# EAGLE board Main PCB (EAGLE 9.1.3)
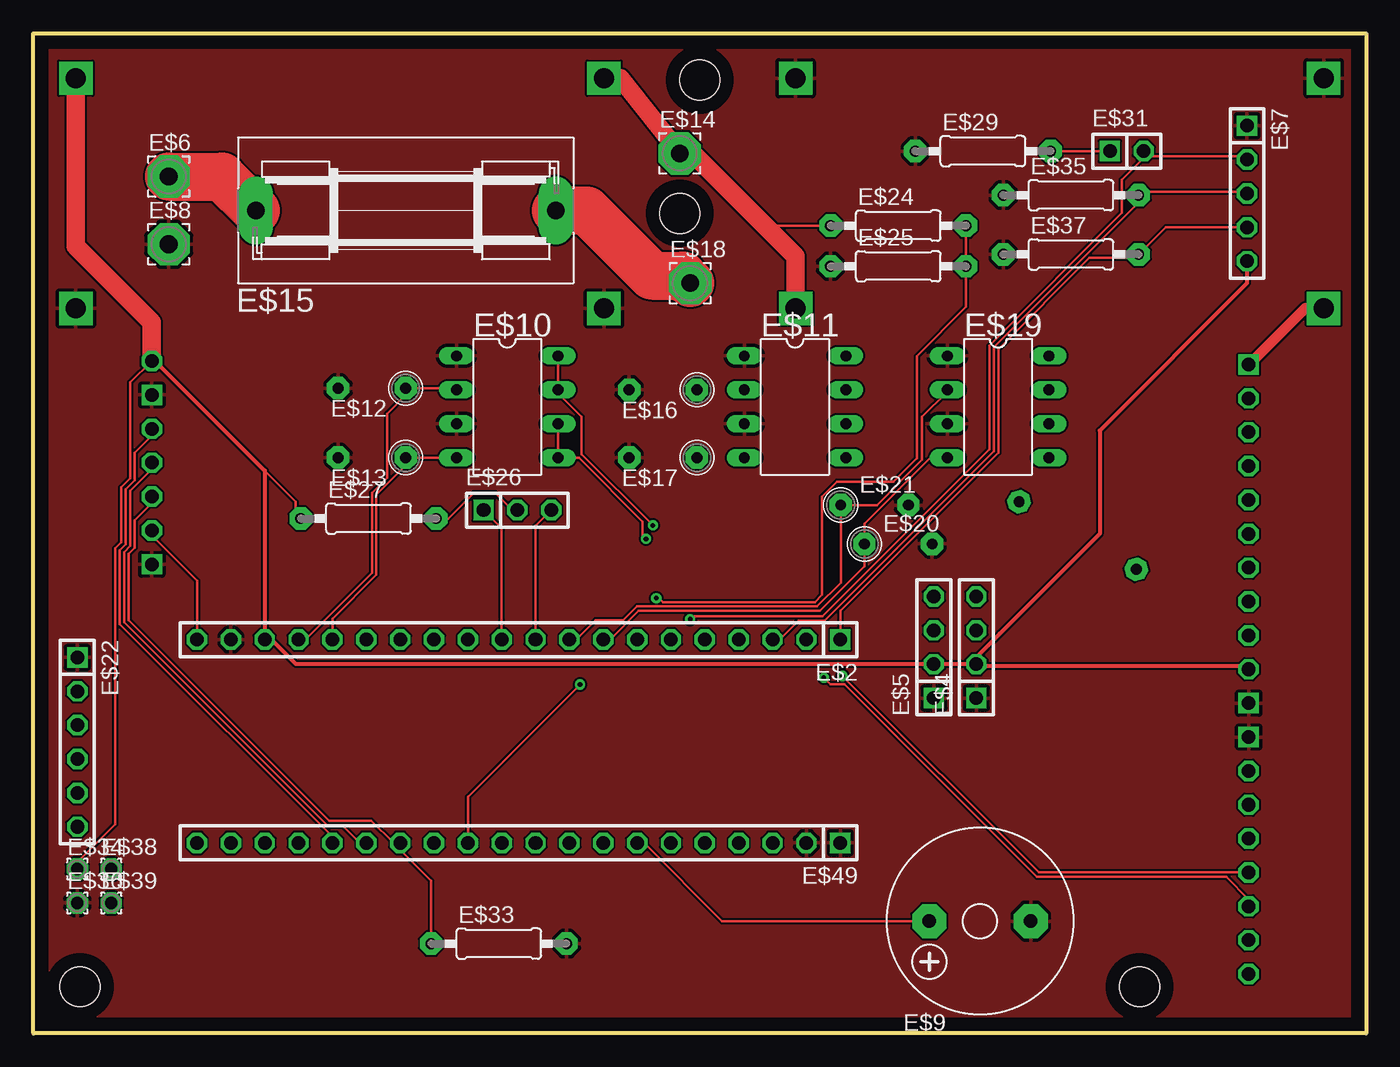
[diagram p0: board, top side]
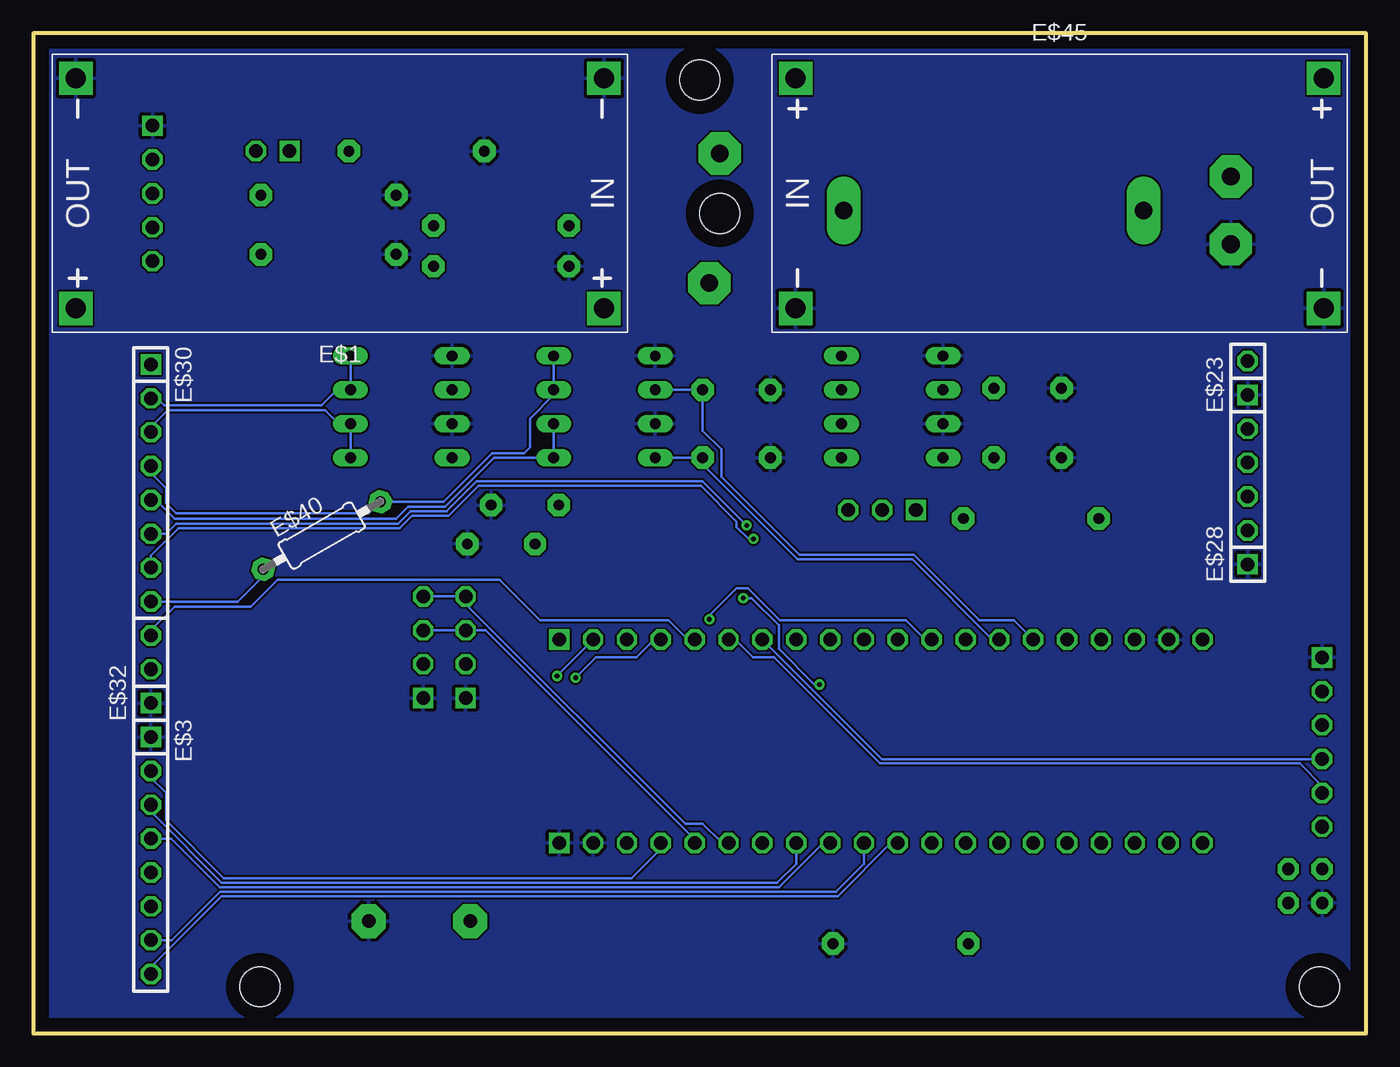
[diagram p1: board, bottom side, seen from below]

Size 100 x 75 mm. Coordinates in mm from the lower left corner, seen from the top.
Outline: 0,0 0,75 100,75 100,0 0,0
Copper layers (1*16): Top 0.035mm / dielectric 1.5mm / Bottom 0.035mm
Design rules "default": minimum track width 6mil, minimum drill 0.35mm, track to track 6mil, track to pad 6mil, pad to pad 6mil, via to via 6mil, smd to smd 6mil, copper to edge 40mil, drill to drill 6mil, minimum pad ring 10mil, minimum via ring 8mil, stop-mask expansion 4mil, vias tented up to drill 0mil, thermal gap 10mil
Holes 3 mm at 3.5,3.5 83,3.5 50,71.5 48.5,61.5

## Footprints (pad centres in the part's own frame; a part is rotated, then mirrored left to right if it is on the bottom)
DC-DC-STEP-DOWN-LM2596 = drill 1.5 pad 2.5 square: IN+ -19.812,8.636; IN- -19.812,-8.636; OUT+ 19.812,8.636; OUT- 19.812,-8.636
1X20 = drill 1.016 square: 1 -24.13,0 | drill 1.016 octagon: 2 -21.59,0; 3 -19.05,0; 4 -16.51,0; 5 -13.97,0; 6 -11.43,0; 7 -8.89,0; 8 -6.35,0; 9 -3.81,0; 10 -1.27,0; 11 1.27,0; 12 3.81,0; 13 6.35,0; 14 8.89,0; 15 11.43,0; 16 13.97,0; 17 16.51,0; 18 19.05,0; 19 21.59,0; 20 24.13,0
1X08 = drill 1.016 square: 1 -8.89,0 | drill 1.016 octagon: 2 -6.35,0; 3 -3.81,0; 4 -1.27,0; 5 1.27,0; 6 3.81,0; 7 6.35,0; 8 8.89,0
1X04 = drill 1.016 square: 1 -3.81,0 | drill 1.016 octagon: 2 -1.27,0; 3 1.27,0; 4 3.81,0
3,17/1,3 = drill 1.321 pad 3.175 octagon: 1 0,0
1X05 = drill 1.016 square: 1 -5.08,0 | drill 1.016 octagon: 2 -2.54,0; 3 0,0; 4 2.54,0; 5 5.08,0
F/CM12P = drill 1.016 pad 2.54 octagon: + 3.81,0; - -3.81,0
DIL8 = drill 0.813 long: 1 -3.81,-3.81; 2 -1.27,-3.81; 3 1.27,-3.81; 4 3.81,-3.81; 5 3.81,3.81; 6 1.27,3.81; 7 -1.27,3.81; 8 -3.81,3.81
0207/5V = drill 0.813 pad 1.676 octagon: 1 -2.54,0; 2 2.54,0
SH22,5A = drill 1.321 pad 2.54 long: 1 -11.252,0; 2 11.252,0
1X06 = drill 1.016 square: 1 -6.35,0 | drill 1.016 octagon: 2 -3.81,0; 3 -1.27,0; 4 1.27,0; 5 3.81,0; 6 6.35,0
1X02 = drill 1.016 square: 1 -1.27,0 | drill 1.016 octagon: 2 1.27,0
0207/10 = drill 0.813 pad 1.676 octagon: 1 -5.08,0; 2 5.08,0
1X03 = drill 1.016 square: 1 -2.54,0 | drill 1.016 octagon: 2 0,0; 3 2.54,0
1,6/0,9 = drill 0.914 pad 1.6 octagon: 1 0,0

## Placement (x,y rotation side)
E$1  [DC-DC-STEP-DOWN-LM2596]  77,63 180 bottom
E$2  [1X20]  36.41,29.53 180 top
E$3  [1X08]  91.19,13.34 270 bottom
E$4  [1X04]  70.75,28.96 90 top
E$5  [1X04]  67.56,28.96 90 top
E$6  [3,17/1,3]  10.16,64.26 0 top
E$7  [1X05]  91.06,62.99 270 top
E$8  [3,17/1,3]  10.16,59.18 0 top
E$9  [F/CM12P]  71.03,8.42 180 top
E$10  [DIL8]  35.56,46.99 270 top
E$11  [DIL8]  57.15,46.99 270 top
E$12  [0207/5V]  25.4,48.39 180 top
E$13  [0207/5V]  25.4,43.18 180 top
E$14  [3,17/1,3]  48.5,66 0 top
E$15  [SH22,5A]  27.94,61.72 0 top
E$16  [0207/5V]  47.24,48.26 180 top
E$17  [0207/5V]  47.24,43.18 180 top
E$18  [3,17/1,3]  49.28,56.26 0 top
E$19  [DIL8]  72.39,46.99 270 top
E$20  [0207/5V]  64.9,36.7 0 top
E$21  [0207/5V]  63.12,39.62 0 top
E$22  [1X06]  3.3,21.84 270 top
E$23  [1X02]  8.89,49.15 90 bottom
E$24  [0207/10]  64.9,60.58 0 top
E$25  [0207/10]  64.9,57.53 0 top
E$26  [1X03]  36.32,39.24 0 top
E$27  [0207/10]  25.15,38.61 0 top
E$28  [1X05]  8.89,40.26 90 bottom
E$29  [0207/10]  71.25,66.17 0 top
E$30  [1X08]  91.19,41.27 270 bottom
E$31  [1X02]  82.04,66.17 0 top
E$32  [1X03]  91.19,27.3 90 bottom
E$33  [0207/10]  34.92,6.73 0 top
E$34  [1,6/0,9]  3.3,12.32 0 top
E$35  [0207/10]  77.85,62.87 0 top
E$36  [1,6/0,9]  3.3,9.78 0 top
E$37  [0207/10]  77.85,58.42 0 top
E$38  [1,6/0,9]  5.84,12.32 0 top
E$39  [1,6/0,9]  5.84,9.78 0 top
E$40  [0207/10]  78.36,37.34 30 bottom
E$45  [DC-DC-STEP-DOWN-LM2596]  23,63 0 bottom
E$49  [1X20]  36.41,14.29 180 top

## Library data of the parts
E$1 E$45 = diy-modules
E$2-E$5 E$7 E$22 E$23 E$26 E$28 E$30-E$32 E$49 = female headers
E$6 E$8 E$14 E$18 E$34 E$36 E$38 E$39 = wirepad
E$9 = buzzer
E$10 E$11 E$19 = microchip
E$12 E$13 E$16 E$17 E$20 E$21 E$24 E$25 E$27 E$29 E$33 E$35 E$37 E$40 = adafruit
E$15 = fuse

## Nets
GND: E$1.IN- E$1.OUT- E$2.19 E$3.1 E$4.1 E$5.1 E$7.1 E$8.1 E$9.- E$10.1 E$10.3 E$11.1 E$11.3 E$12.2 E$13.2 E$16.2 E$17.2 E$19.1 E$19.3 E$20.2 E$21.2 E$22.1 E$23.1 E$25.1 E$28.1 E$29.1 E$32.1 E$33.2 E$35.1 E$36.1 E$37.1 E$45.IN- E$45.OUT- E$49.1 E$49.2
S$1: E$6.1 E$15.1
S$2: E$15.2 E$18.1
S$3: E$24.2 E$25.2 E$49.12
S$4: E$2.5 E$32.3
S$5: E$2.18 E$4.2 E$5.2 E$7.5 E$23.2 E$27.1 E$32.2 E$34.1 E$45.OUT+
S$6: E$1.OUT+ E$30.1
S$7: E$2.20 E$28.2
S$8: E$9.+ E$49.7
S$9: E$4.3 E$5.3 E$49.5
S$10: E$4.4 E$5.4 E$49.6
S$11: E$30.8 E$40.1
S$12: E$26.2 E$27.2
S$13: E$2.7 E$22.4
S$14: E$2.6 E$22.5
S$15: E$3.8 E$49.11
S$16: E$3.7 E$49.10
S$17: E$2.2 E$3.5
S$18: E$2.4 E$3.6
S$19: E$3.4 E$49.9
S$20: E$3.3 E$49.8
S$21: E$3.2 E$49.4
S$22: E$2.11 E$26.1
S$23: E$2.10 E$26.3
S$24: E$2.1 E$7.4 E$37.2
S$25: E$2.17 E$10.2 E$12.1
S$26: E$28.5 E$49.16
S$27: E$28.4 E$49.15
S$28: E$28.3 E$33.1 E$49.14
S$30: E$2.3 E$7.3 E$35.2
S$31: E$11.7 E$11.8 E$30.4 E$40.2
S$32: E$1.IN+ E$14.1 E$24.1 E$45.IN+
S$34: E$29.2 E$31.1
S$35: E$2.16 E$10.4 E$13.1
S$36: E$2.15 E$11.2 E$16.1
S$37: E$2.14 E$11.4 E$17.1
S$38: E$11.5 E$11.6 E$30.5
S$39: E$2.8 E$19.4 E$20.1
S$40: E$2.9 E$19.2 E$21.1
S$41: E$19.7 E$19.8 E$30.2
S$42: E$19.5 E$19.6 E$30.3
S$43: E$10.7 E$10.8 E$30.6
S$44: E$10.5 E$10.6 E$30.7
S$45: E$2.12 E$7.2 E$31.2

## Tracks (layer width: path | path; a pad name or v marks a point on that pad's centre or on a via)
GND
  pour Top: -5.08,80.01 -5.08,-1.27 5.08,-11.43 105.41,-11.43 110.49,-6.35 121.92,5.08 121.92,74.93 116.84,80.01
  pour Bottom: -16.51,86.36 -15.24,85.09 -15.24,-5.08 -6.35,-13.97 64.77,-13.97 93.98,-13.97 127,19.05 127,74.93 116.84,85.09 115.57,86.36
S$1
  Top 3.6: E$6.1 14.15,64.26 E$15.1
S$2
  Top 3.6: E$15.2 41.52,61.72 46.41,56.83 48.71,56.83 E$18.1
S$3  (via drill 0.35)
  Top 0.184: E$24.2 E$25.2 69.98,54.48 66.29,50.8 66.29,43.12 64.55,41.37 60.29,41.37 59.18,40.26 59.18,32.89 58.64,32.35 47.24,32.35 46.95,32.64 v46.74,32.64 | v41.02,26.16 32.6,17.74 E$49.12
  Bottom 0.184: v46.74,32.64 46.1,32.64 44.07,30.61 44.07,28.83 41.4,26.16 v41.02,26.16
S$4
  Bottom 0.184: E$2.5 50.89,29.53 52.35,30.99 61.98,30.99 65.02,34.04 81.66,34.04 83.69,32 89.41,32 91.19,30.23 E$32.3
S$5
  Top 0.184: 17.36,42.2 19.68,39.88 19.68,38.99 E$27.1 | E$23.2 7.28,48.81 7.28,41.64 6.61,40.96 6.61,36.84 6.15,36.37 6.15,15.67 3.3,12.83 E$34.1
  Top 0.3: E$4.2 E$5.2 19.71,27.69 17.87,29.53 E$2.18 17.36,41.57 17.36,42.2 9.14,50.42 E$23.2 | E$4.2 70.75,28.2 72.52,29.97 80.01,37.47 80.01,45.21 91.06,56.26 E$7.5 | E$32.2 90.93,27.56 70.88,27.56 E$4.2
  Top 1.4: E$45.OUT+ 3.19,59.04 8.89,53.34 E$23.2
S$6
  Top 0.8: E$30.1 91.22,50.16 95.42,54.36 E$1.OUT+
S$7
  Top 0.184: E$2.20 12.28,33.95 8.89,37.34 E$28.2
S$8
  Top 0.184: E$9.+ 51.68,8.42 45.81,14.29 E$49.7
S$9
  Bottom 0.184: E$4.3 E$5.3 66.07,30.23 50.38,14.54 E$49.5
S$10
  Bottom 0.184: E$4.4 E$5.4 67.56,32.2 51.08,15.72 49.78,15.72 48.35,14.29 E$49.6
S$11
  Bottom 0.184: E$30.8 84.66,32.38 82.76,34.29 E$40.1
S$12
  Top 0.184: E$27.2 31.11,38.61 33.02,40.51 34.67,40.51 35.94,39.24 E$26.2
S$13
  Bottom 0.184: E$22.4 36.35,20.57 E$2.7
S$14
  Bottom 0.184: E$2.6 47.33,29.53 46,28.19 44.44,28.19 36.49,20.24 5,20.24 3.3,18.54 E$22.5
S$15
  Bottom 0.184: E$3.8 91.19,4.95 85.85,10.29 39.65,10.29 35.65,14.29 E$49.11
S$16
  Bottom 0.184: E$49.10 37.68,12.73 39.79,10.62 85.99,10.62 89.63,6.99 E$3.7
S$17  (via drill 0.35)
  Top 0.184: v60.71,26.8 75.44,12.06 E$3.5
  Bottom 0.184: E$2.2 60.71,26.82 v60.71,26.8
S$18  (via drill 0.35)
  Top 0.184: v59.31,26.67 v59.32,26.67 59.81,26.17 60.85,26.17 75.3,11.73 89.49,11.73 91.19,10.03 E$3.6
  Bottom 0.184: E$2.4 53.43,29.53 54.76,28.19 57.78,28.19 v59.31,26.67
S$19
  Bottom 0.184: E$49.9 40.73,14.29 44.06,10.96 86.02,10.96 89.66,14.61 E$3.4
S$20
  Bottom 0.184: E$49.8 42.76,12.73 44.2,11.3 85.87,11.3 90.95,16.38 90.95,16.91 E$3.3
S$21
  Bottom 0.184: E$49.4 52.92,13.84 55.12,11.64 85.71,11.64 90.04,15.97 90.04,18.03 91.19,19.18 E$3.2
S$22
  Top 0.184: E$2.11 35.14,37.88 E$26.1
S$23
  Top 0.184: E$2.10 37.68,38.06 E$26.3
S$24
  Top 0.184: E$7.4 84.96,60.45 E$37.2 82.68,58.17 79.25,58.17 72.39,51.31 72.39,43.53 60.54,31.69 E$2.1
S$25
  Top 0.184: E$10.2 31.62,48.39 E$12.1 27.94,47.88 26.54,46.48 26.54,41.67 25.4,40.52 25.4,34.54 20.38,29.53 E$2.17
S$26
  Top 0.184: E$49.16 22.67,14.51 6.48,30.7 6.48,36.23 6.95,36.7 6.95,40.82 7.62,41.5 7.62,43.56 8.89,44.83 E$28.5
S$27
  Top 0.184: E$49.15 24.47,14.29 23.2,15.56 22.1,15.56 6.82,30.84 6.82,36.09 7.28,36.56 7.28,40.69 8.89,42.29 E$28.4
S$28
  Top 0.184: E$28.3 8.89,39.75 7.62,38.48 7.62,36.42 7.16,35.95 7.16,30.98 22.19,15.94 25.36,15.94 27.01,14.29 E$49.14 27.52,13.75 29.84,11.43 E$33.1
S$30
  Top 0.184: E$2.3 55.97,29.53 57.4,30.96 59.34,30.96 72.05,43.67 72.05,51.45 82.93,62.33 E$35.2 83.19,63.12 90.93,63.12 E$7.3
S$31
  Bottom 0.184: E$11.8 E$11.7 60.96,47.88 62.74,46.1 62.74,43.94 63.16,43.52 65.58,43.52 69.22,39.88 E$40.2 74.85,38.99 89.28,38.99 90.04,39.75 90.04,40.89 91.19,42.04 E$30.4
S$32
  Top 0.184: E$24.1 55.37,60.58 55.12,60.33
  Top 1.4: E$45.IN+ 44.06,71.64 E$14.1 49.28,66.18 55.12,60.33 57.19,58.27 E$1.IN+
S$34
  Top 0.184: E$31.1 E$29.2
S$35
  Top 0.184: E$2.16 22.44,31.11 25.74,34.41 25.74,40.39 27.94,42.59 E$13.1 E$10.4
S$36
  Bottom 0.184: E$2.15 26.44,30.99 29.01,30.99 33.92,35.9 42.53,35.9 48.39,41.75 48.39,43.81 49.78,45.21 E$16.1 E$11.2
S$37
  Bottom 0.184: E$11.4 E$17.1 49.78,42.67 42.67,35.56 34.06,35.56 28.03,29.53 E$2.14
S$38
  Bottom 0.184: E$11.6 E$11.5 65.44,43.18 69.12,39.5 71.88,39.5 72.77,38.61 89.41,38.61 90.81,40.01 E$30.5
S$39
  Top 0.184: E$2.8 43.27,29.53 45.42,31.68 59,31.68 62.34,35.01 62.34,36.69 E$20.1 62.36,38.23 67.31,43.18 E$19.4
S$40
  Top 0.184: E$19.2 68.58,48.13 66.67,46.23 66.67,43.02 63.28,39.62 E$21.1 60.58,39.12 60.58,33.78 58.81,32.01 45.28,32.01 44.25,30.99 42.19,30.99 40.73,29.53 E$2.9
S$41
  Bottom 0.184: E$19.8 E$19.7 77.22,48.26 78.36,47.12 90.17,47.12 90.68,47.62 E$30.2
S$42
  Bottom 0.184: E$19.5 E$19.6 77.09,45.72 78.11,46.74 89.92,46.74 91.19,45.47 E$30.3
S$43  (via drill 0.35)
  Top 0.184: v46.48,38.1 41.15,43.43 41.15,46.23 39.37,48.01 E$10.7 E$10.8
  Bottom 0.184: E$30.6 90.04,37.47 89.28,38.23 72.64,38.23 71.71,39.16 68.98,39.16 66.74,41.4 49.78,41.4 v46.48,38.1
S$44  (via drill 0.35)
  Top 0.184: v45.97,37.08 45.72,37.34 45.72,38.39 40.93,43.18 E$10.5 E$10.6
  Bottom 0.184: v45.97,37.08 46.35,37.08 47.24,37.97 47.24,38.39 49.92,41.07 66.6,41.07 68.84,38.82 71.57,38.82 72.5,37.89 89.11,37.89 91.19,35.81 E$30.7
S$45  (via drill 0.35)
  Top 0.184: v49.28,31.05 49.28,31.11 49.46,31.3 59.2,31.3 71.72,43.81 71.72,51.59 81.66,61.53 81.66,64.01 83.31,65.66 E$31.2 83.69,65.79 90.81,65.79 E$7.2
  Bottom 0.184: v49.28,31.05 49.28,31.37 47.26,33.39 46.37,33.39 43.97,30.99 34.54,30.99 33.08,29.53 E$2.12

## Text on the board
tText: OUT+ | IN+ | IN- | OUT- | Short if use / hall switch | G | 100k | KS | VCC | SENSORS | 100k | RPM | 510 | SPEED | GND | 120 | 100k | 5V | 23mm holder 20x5mm 5A fuse | OUT- | IN- | IN+ | OUT+ | . | . | . | 5V | 12V | USB | G | 10k | 10k | LTS | AP9971GD / with heatsink / TAILLIGHT | AP9971GD / with heatsink / TAILLIGHT | AP9971GD / with heatsink / TAILLIGHT | FR_BR | RTS | RE_BR | 10k | 10k | HL | HL & TL | AMB | SENSORS | 10k | HB | 200 | RPM / LED | 3V3 | U | 5V | D | 10k | TL | G | BR_LI | 3V3 | G | 5V | B9 | B8 | B7 | B6 | B5 | B4 | B3 | A15 | A12 | A11 | RX1 | TX1 | A8 | B15 | B14 | B13 | B12 | EXTRA | G | SIG | DISPLAY | DS3231 | battery side up | SERVO | 5V | G | USB2Serial | G | STM32F103 | RESET | RTS | LTS | BUTTONS | 5V | A13 | VBAT | C13 | C14 | C15 | A0 | A1 | A2 | A3 | A4 | A5 | A6 | A7 | B0 | B1 | SCL2 | SDA2 | RST | 3V3 | G | G | BUZZER / 12mm | ENTER | G | A14 | HB | DIGITAL / ENCODER | 10k | BACK | LI
bText: LM2596 @ 5V / with heatsink | LM2596 @ 12V / with heatsink | SWITCH | 5V | 12V | USB | G | LTS | AP9971GD / with heatsink / TAILLIGHT | AP9971GD / with heatsink / HEADLIGHT | AP9971GD / with heatsink / TURN SIGAL | FRONT_BR | RTS | REAR_BR | HL | HL & TL | SENSORS | AMB | HB | 3V3 | 500 | TL | G | BR_LI | EXTRA | SIG | 5V | SERVO | G | G | Onboard computer for bicycle / Main board / rev1 | RESET | RTS | LTS | BUTTONS | + | BUZZER / 12mm | ENTER | HB | BACK | Please read instructions before soldering! | LI
200bmp: E:/Silvio/Youtube/Vizualni dio/Logotip/PCB dno logo.bmp